# EAGLE board control (EAGLE 6.3)
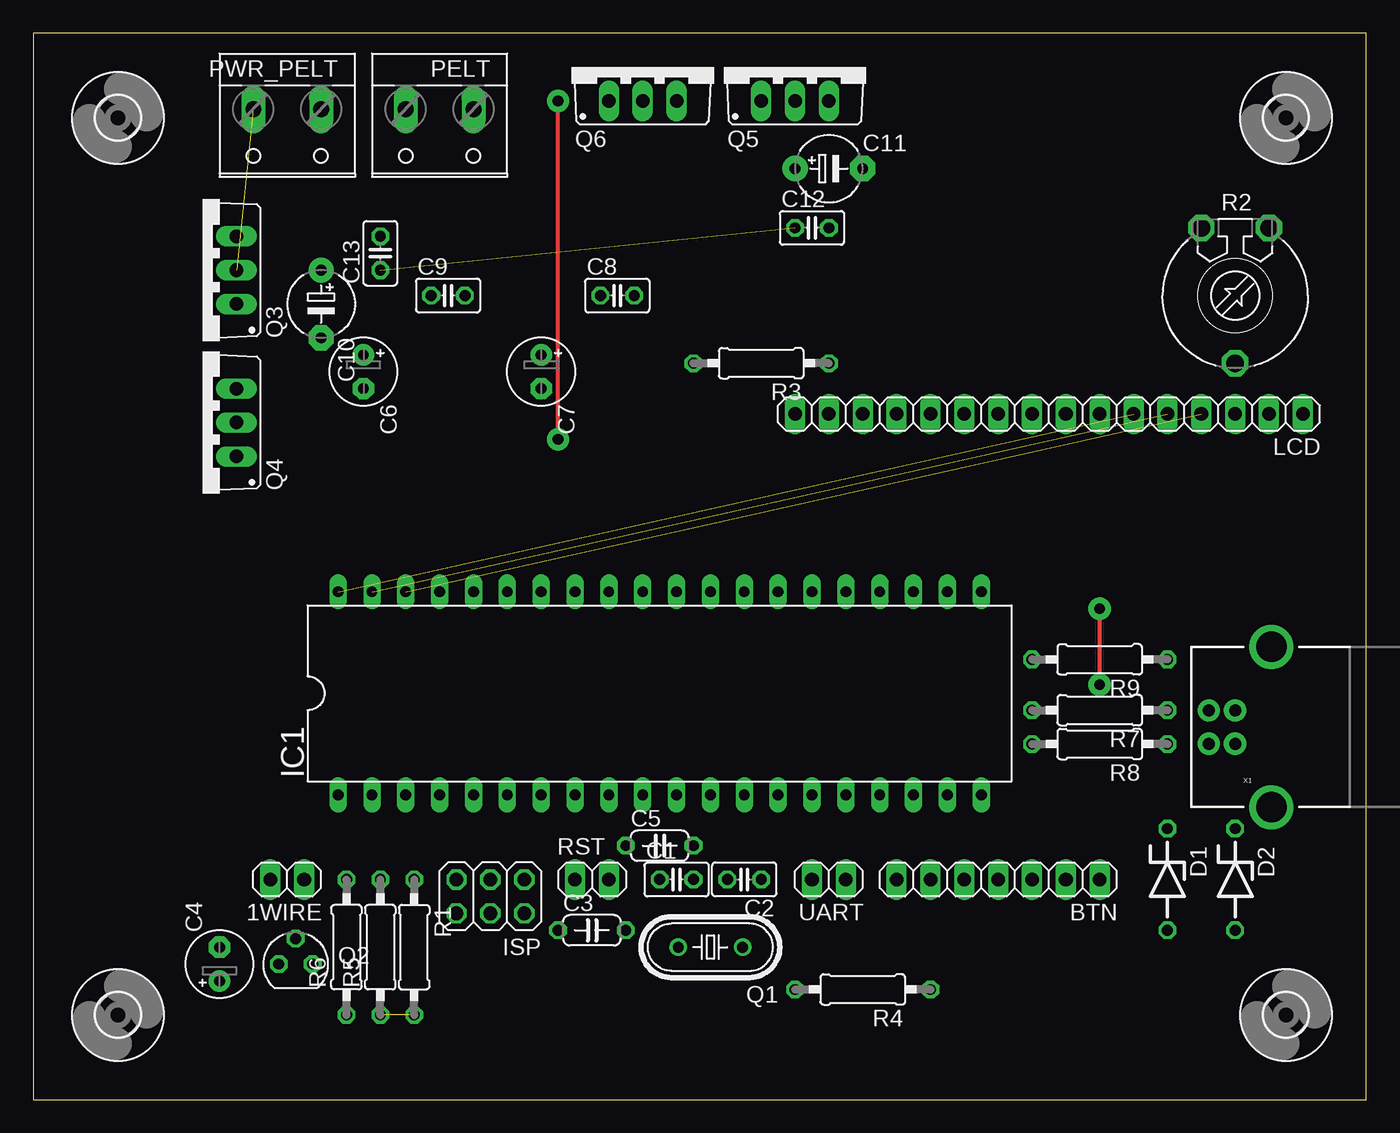
[diagram p0: board, top side]
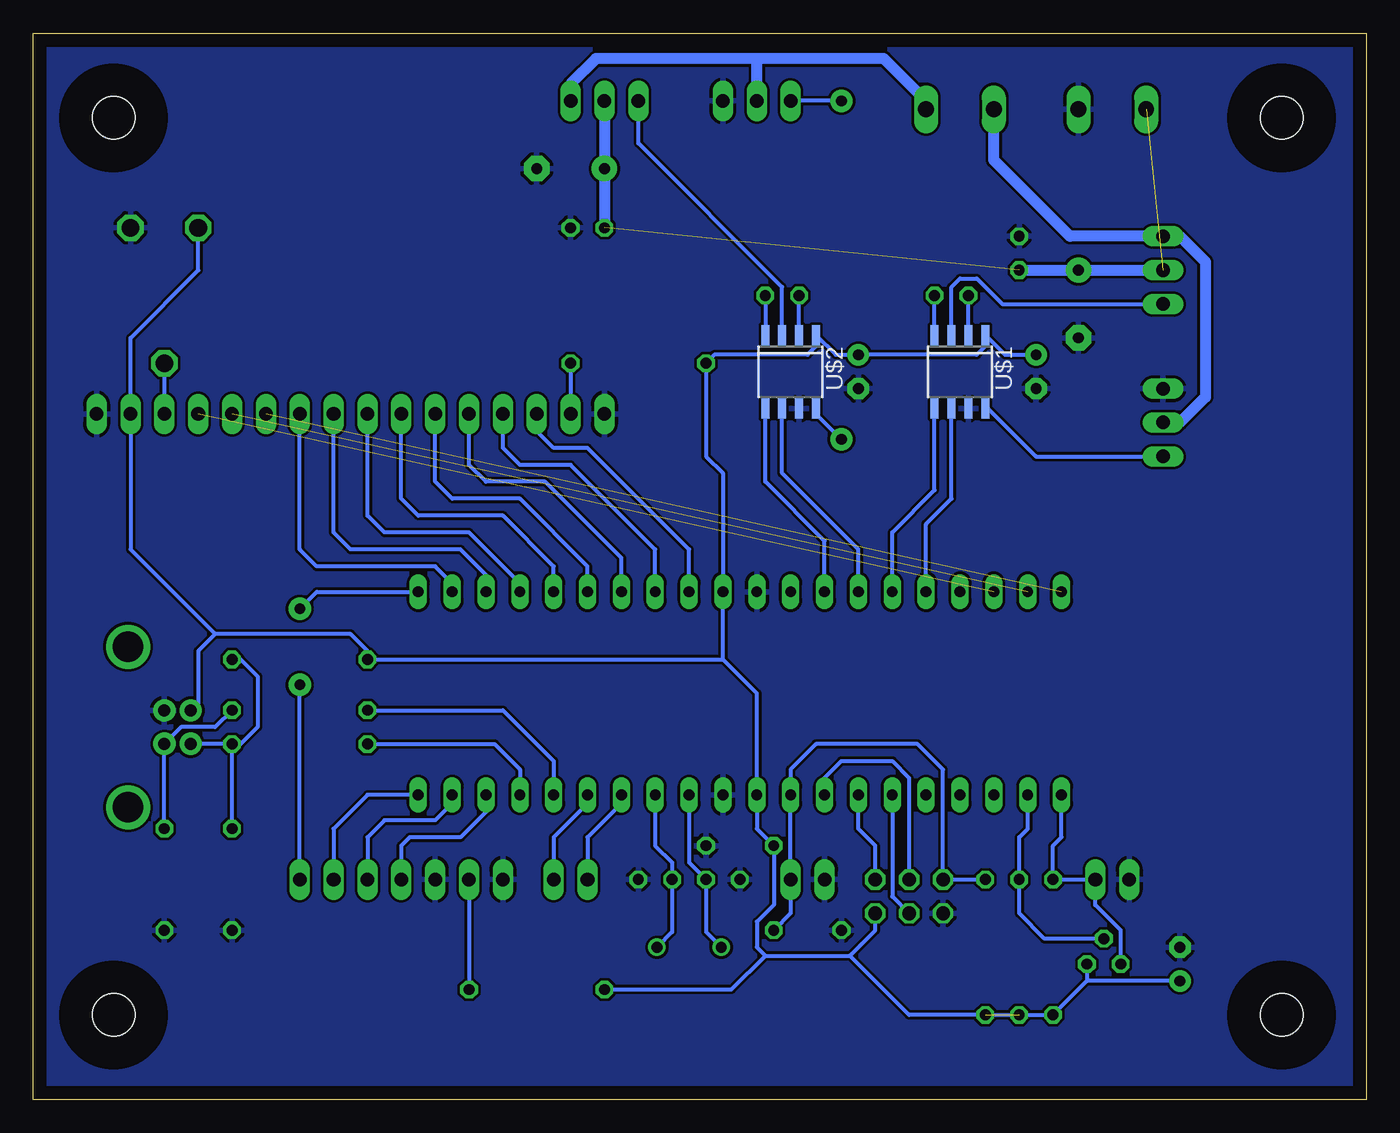
[diagram p1: board, bottom side, seen from below]

Size 100 x 80 mm. Coordinates in mm from the lower left corner, seen from the top.
Outline: 0,0 100,0 100,80 0,80 0,0
Copper layers (1*16): Top 0.035mm / dielectric 1.5mm / Bottom 0.035mm
Design rules "default": minimum track width 10mil, minimum drill 24mil, track to track 8mil, track to pad 8mil, pad to pad 8mil, via to via 8mil, smd to smd 8mil, copper to edge 40mil, drill to drill 8mil, minimum pad ring 10mil, minimum via ring 8mil, stop-mask expansion 4mil, vias tented up to drill 0mil, thermal gap 10mil

## Footprints (pad centres in the part's own frame; a part is rotated, then mirrored left to right if it is on the bottom)
1X02 = drill 1.016 long: 1 -1.27,0; 2 1.27,0
1X07 = drill 1.016 long: 1 -7.62,0; 2 -5.08,0; 3 -2.54,0; 4 0,0; 5 2.54,0; 6 5.08,0; 7 7.62,0
C025-025X050 = drill 0.813 octagon: 1 -1.27,0; 2 1.27,0
C050-024X044 = drill 0.813 octagon: 1 -2.54,0; 2 2.54,0
E2,5-5 = drill 0.813 pad 1.6: + -1.27,0 | drill 0.813 pad 1.6 octagon: - 1.27,0
E5-5 = drill 0.813 pad 1.905: + -2.54,0 | drill 0.813 pad 1.905 octagon: - 2.54,0
ZDIO-7.5 = drill 0.813 octagon: A 3.81,0; C -3.81,0
3,2 = hole 3.2: 0,0
DIL40 = drill 0.813 long: 1 -24.13,-7.62; 2 -21.59,-7.62; 3 -19.05,-7.62; 4 -16.51,-7.62; 5 -13.97,-7.62; 6 -11.43,-7.62; 7 -8.89,-7.62; 8 -6.35,-7.62; 9 -3.81,-7.62; 10 -1.27,-7.62; 11 1.27,-7.62; 12 3.81,-7.62; 13 6.35,-7.62; 14 8.89,-7.62; 15 11.43,-7.62; 16 13.97,-7.62; 17 16.51,-7.62; 18 19.05,-7.62; 19 21.59,-7.62; 20 24.13,-7.62; 21 24.13,7.62; 22 21.59,7.62; 23 19.05,7.62; 24 16.51,7.62; 25 13.97,7.62; 26 11.43,7.62; 27 8.89,7.62; 28 6.35,7.62; 29 3.81,7.62; 30 1.27,7.62; 31 -1.27,7.62; 32 -3.81,7.62; 33 -6.35,7.62; 34 -8.89,7.62; 35 -11.43,7.62; 36 -13.97,7.62; 37 -16.51,7.62; 38 -19.05,7.62; 39 -21.59,7.62; 40 -24.13,7.62
2X03 = drill 1.016 octagon: 1 -2.54,-1.27; 2 -2.54,1.27; 3 0,-1.27; 4 0,1.27; 5 2.54,-1.27; 6 2.54,1.27
1X16 = drill 1.016 long: 1 -19.05,0; 2 -16.51,0; 3 -13.97,0; 4 -11.43,0; 5 -8.89,0; 6 -6.35,0; 7 -3.81,0; 8 -1.27,0; 9 1.27,0; 10 3.81,0; 11 6.35,0; 12 8.89,0; 13 11.43,0; 14 13.97,0; 15 16.51,0; 16 19.05,0
W237-132 = drill 1.194 long: 1 -2.54,-0.635; 2 2.54,-0.635
HC49U-V = drill 0.813: 1 -2.413,0; 2 2.413,0
SOT54E = drill 0.813 octagon: D -1.27,0; G 0,1.905; S 1.27,0
TO220BV = drill 1.016 long: D 0,-2.54; G -2.54,-2.54; S 2.54,-2.54
0207/10 = drill 0.813 octagon: 1 -5.08,0; 2 5.08,0
LI10 = drill 1.321 octagon: A -2.54,-5.08; E 2.54,-5.08; S 0,5.08
SOIC8 = smd 0.6 x 1.5: 1 -1.905,-2.75; 2 -0.635,-2.75; 3 0.635,-2.75; 4 1.905,-2.75; 5 1.905,2.75; 6 0.635,2.75; 7 -0.635,2.75; 8 -1.905,2.75
USB-B-PTH = drill 0.914 pad 1.676: D+ 0,1.25; D- 1.981,1.25; GND 0,-1.25; VBUS 1.981,-1.25 | drill 2.286: S1 -2.718,-6.02; S2 -2.718,6.02

## Placement (x,y rotation side)
1WIRE  [1X02]  19.05,16.51 180 top
BTN  [1X07]  72.39,16.51 180 top
C1  [C025-025X050]  48.26,16.51 0 top
C2  [C025-025X050]  53.34,16.51 180 top
C3  [C050-024X044]  41.91,12.7 0 top
C4  [E2,5-5]  13.97,10.16 90 top
C5  [C050-024X044]  46.99,19.05 0 top
C6  10u  [E2,5-5]  24.77,54.61 270 top
C7  10u  [E2,5-5]  38.1,54.61 270 top
C8  100n  [C025-025X050]  43.81,60.33 0 top
C9  100n  [C025-025X050]  31.11,60.33 0 top
C10  4u7  [E5-5]  21.59,59.69 270 top
C11  4u7  [E5-5]  59.69,69.85 0 top
C12  100n  [C025-025X050]  58.42,65.41 0 top
C13  100n  [C025-025X050]  26.04,63.5 90 top
D1  3V6  [ZDIO-7.5]  85.09,16.51 270 top
D2  3V6  [ZDIO-7.5]  90.17,16.51 270 top
H1  MOUNT-HOLE3.2  [3,2]  6.35,6.35 0 top
H2  MOUNT-HOLE3.2  [3,2]  93.98,6.35 0 top
H3  MOUNT-HOLE3.2  [3,2]  6.35,73.66 0 top
H4  MOUNT-HOLE3.2  [3,2]  93.98,73.66 0 top
IC1  MEGA16-P  [DIL40]  46.99,30.48 0 top
ISP  [2X03]  34.29,15.24 180 top
LCD  [1X16]  76.2,51.44 180 top
PELT  [W237-132]  30.48,73.66 180 top
PWR_PELT  [W237-132]  19.05,73.66 180 top
Q1  [HC49U-V]  50.8,11.43 180 top
Q2  BS250  [SOT54E]  19.68,10.16 0 top
Q3  IRF530  [TO220BV]  12.7,62.23 90 top
Q4  IRF530  [TO220BV]  12.7,50.8 90 top
Q5  IRF530  [TO220BV]  57.15,77.47 0 top
Q6  IRF530  [TO220BV]  45.72,77.47 0 top
R1  4k7  [0207/10]  28.57,11.43 270 top
R2  [LI10]  90.17,60.33 180 top
R3  ??  [0207/10]  54.61,55.24 180 top
R4  ??  [0207/10]  62.23,8.26 180 top
R5  ??  [0207/10]  26.04,11.43 90 top
R6  4k7  [0207/10]  23.5,11.43 90 top
R7  68R  [0207/10]  80.01,29.21 180 top
R8  68R  [0207/10]  80.01,26.67 180 top
R9  1k5  [0207/10]  80.01,33.02 180 top
RST  [1X02]  41.91,16.51 0 top
U$1  LM5101  [SOIC8]  30.48,54.61 180 bottom
U$2  LM5101  [SOIC8]  43.18,54.61 180 bottom
UART  [1X02]  59.69,16.51 180 top
X1  USBPTH  [USB-B-PTH]  90.17,27.94 180 top

## Library data of the parts
1WIRE BTN ISP LCD RST UART = pinhead
C1-C13 R1 R3-R9 = resistor
D1 D2 = diode
H1-H4 = holes
IC1 = atmel; MPN: ATMEGA16-16PU; OC_FARNELL: 9171142; OC_NEWARK: 01M6885
PELT PWR_PELT = con-wago-508; OC_FARNELL: unknown; OC_NEWARK: unknown
Q1 = crystal; OC_FARNELL: 1666969; OC_NEWARK: unknown
Q2 = transistor-small-signal
Q3-Q6 = transistor-power
R2 = pot
U$1 U$2 = lm5101
X1 = SparkFun

## Nets
+5V: C4.+ C5.1 C6.+ C7.+ IC1.10 IC1.30 ISP.2 LCD.2 Q2.S R1.2 R2.E R3.2 R4.2 R5.1 R6.1 R9.2 U$1.1 U$2.1 X1.VBUS
GND: 1WIRE.2 BTN.5 BTN.7 C1.1 C2.1 C3.1 C4.- C5.2 C6.- C7.- C10.- C11.- C12.2 C13.2 D1.A D2.A IC1.11 IC1.31 ISP.6 LCD.1 LCD.16 PWR_PELT.1 Q4.S Q6.S R2.A RST.1 U$1.7 U$2.7 X1.GND
MISO: IC1.7 ISP.1
MOSI: IC1.6 ISP.4
N$1: C1.2 IC1.12 Q1.2
N$2: C2.2 IC1.13 Q1.1
N$3: IC1.33 U$2.5
N$4: IC1.2 Q2.G R5.2
N$5: LCD.3 R2.S
N$6: LCD.15 R3.1
N$7: IC1.22 LCD.7
N$8: IC1.23 LCD.8
N$9: IC1.24 LCD.9
N$10: IC1.25 LCD.10
N$11: IC1.26 LCD.11
N$12: IC1.27 LCD.12
N$13: IC1.28 LCD.13
N$14: IC1.29 LCD.14
N$15: IC1.40 LCD.6
N$16: IC1.39 LCD.5
N$17: IC1.38 LCD.4
N$18: IC1.16 R7.2
N$19: IC1.17 R8.2
N$20: BTN.6 R4.1
N$21: BTN.1 IC1.21
N$22: BTN.2 IC1.20
N$23: BTN.3 IC1.19
N$24: BTN.4 IC1.18
N$25: 1WIRE.1 IC1.1 Q2.D R6.2
N$26: IC1.15 UART.1
N$27: IC1.14 UART.2
N$28: D2.C R7.1 X1.D+
N$29: D1.C R8.1 R9.1 X1.D-
N$30: IC1.34 U$2.6
N$31: IC1.35 U$1.5
N$32: IC1.36 U$1.6
N$33: C9.1 U$1.2
N$34: C8.1 U$2.2
N$35: C8.2 U$2.4
N$36: C9.2 U$1.4
N$37: PELT.2 Q3.S Q4.D
N$38: PELT.1 Q5.S Q6.D
N$39: Q3.G U$1.3
N$40: Q4.G U$1.8
N$41: Q5.G U$2.3
N$42: Q6.G U$2.8
N$46: C10.+ C11.+ C12.1 C13.1 PWR_PELT.2 Q3.D Q5.D
RESET: C3.2 IC1.9 ISP.5 R1.1 RST.2
SCK: IC1.8 ISP.3

## Tracks (layer width: path | path; a pad name or v marks a point on that pad's centre or on a via)
+5V  (1 unrouted)
  Bottom 0.305: 48.26,33.02 45.72,30.48 IC1.10 45.72,20.32 C5.1 44.45,14.61 45.72,13.34 45.72,11.43 45.09,10.79 | 48.26,33.02 IC1.30 48.26,46.99 49.53,48.26 R3.2 48.9,55.88 41.91,55.88 41.27,56.52 U$2.1 39.8,55.88 C7.+ 29.21,55.88 28.57,56.52 U$1.1 27.09,55.88 C6.+ | 48.26,33.02 R9.2 74.93,33.66 76.2,34.92 86.36,34.92 | 45.09,10.79 38.73,10.79 | 38.73,10.79 36.83,12.7 ISP.2 | 86.36,34.92 87.63,33.66 87.63,29.75 X1.VBUS | 38.73,10.79 34.29,6.35 R1.2 R6.1 20.95,8.89 | Q2.S 20.95,8.89 | C4.+ 20.95,8.89 | R4.2 47.62,8.26 45.09,10.79 | 86.36,34.92 92.71,41.27 LCD.2 92.71,57.15 87.63,62.23 R2.E
GND
  pour Bottom: 0,81.28 101.6,81.28 101.6,-1.27 -2.54,-1.27 -2.54,81.28
MISO
  Bottom 0.305: ISP.1 36.83,19.05 38.1,20.32 IC1.7
MOSI
  Bottom 0.305: IC1.6 35.56,15.24 ISP.4
N$1
  Bottom 0.305: Q1.2 49.53,12.57 C1.2 50.8,17.78 IC1.12
N$2
  Bottom 0.305: IC1.13 53.34,19.05 52.07,17.78 C2.2 52.07,12.57 Q1.1
N$3
  Bottom 0.305: IC1.33 40.64,41.91 45.09,46.35 U$2.5
N$4
  Bottom 0.305: IC1.2 25.4,20.32 26.04,19.68 R5.2 26.04,13.97 24.13,12.06 Q2.G
N$5
  Bottom 0.305: R2.S LCD.3
N$6
  Bottom 0.305: R3.1 LCD.15
N$7
  Bottom 0.305: IC1.22 68.58,38.73 69.85,40.01 78.74,40.01 80.01,41.27 LCD.7
N$8
  Bottom 0.305: IC1.23 66.04,39.37 67.94,41.27 76.2,41.27 77.47,42.55 LCD.8
N$9
  Bottom 0.305: IC1.24 63.5,38.73 67.31,42.55 73.66,42.55 74.93,43.81 LCD.9
N$10
  Bottom 0.305: IC1.25 60.96,40.01 64.77,43.81 71.12,43.81 72.39,45.09 LCD.10
N$11
  Bottom 0.305: IC1.26 58.42,40.01 63.5,45.09 68.58,45.09 69.85,46.35 LCD.11
N$12
  Bottom 0.305: IC1.27 55.88,40.64 61.59,46.35 66.04,46.35 67.31,47.62 LCD.12
N$13
  Bottom 0.305: IC1.28 53.34,41.27 59.69,47.62 63.5,47.62 64.77,48.9 LCD.13
N$14
  Bottom 0.305: IC1.29 50.8,41.27 58.42,48.9 60.96,48.9 62.23,50.16 LCD.14
N$15  (1 unrouted)
N$16  (1 unrouted)
N$17  (1 unrouted)
N$18
  Bottom 0.305: R7.2 64.77,29.21 60.96,25.4 IC1.16
N$19
  Bottom 0.305: R8.2 65.41,26.67 63.5,24.77 IC1.17
N$20
  Bottom 0.305: BTN.6 R4.1
N$21  (via drill 0.8 pad 1.68)
  Top 0.305: v80.01,31.11 v80.01,36.83
  Bottom 0.305: BTN.1 v80.01,31.11 | v80.01,36.83 78.74,38.1 IC1.21
N$22
  Bottom 0.305: IC1.20 74.93,22.86 77.47,20.32 BTN.2
N$23
  Bottom 0.305: IC1.19 68.58,22.23 69.85,20.95 73.66,20.95 74.93,19.68 BTN.3
N$24
  Bottom 0.305: IC1.18 66.04,21.59 67.94,19.68 71.75,19.68 72.39,19.05 BTN.4
N$25
  Bottom 0.305: IC1.1 22.86,19.68 23.5,19.05 R6.2 1WIRE.1 20.32,14.61 18.41,12.7 Q2.D
N$26
  Bottom 0.305: IC1.15 58.42,22.23 60.96,19.68 UART.1
N$27
  Bottom 0.305: IC1.14 55.88,22.23 58.42,19.68 UART.2
N$28
  Bottom 0.305: R7.1 86.36,27.94 88.92,27.94 X1.D+ D2.C
N$29
  Bottom 0.305: R8.1 88.17,26.67 | R9.1 84.45,33.02 83.19,31.75 83.19,27.94 84.45,26.67 R8.1 | D1.C R8.1
  Bottom 0.406: 88.17,26.67 X1.D-
N$30
  Bottom 0.305: IC1.34 38.1,41.27 43.81,46.99 U$2.6
N$31
  Bottom 0.305: IC1.35 35.56,42.55 32.38,45.72 U$1.5
N$32
  Bottom 0.305: IC1.36 33.02,43.18 31.11,45.09 U$1.6
N$33
  Bottom 0.305: U$1.2 C9.1
N$34
  Bottom 0.305: U$2.2 C8.1
N$35
  Bottom 0.305: C8.2 U$2.4
N$36
  Bottom 0.305: U$1.4 C9.2
N$37
  Bottom 0.813: PELT.2 27.94,70.48 22.23,64.77 Q3.S 13.97,64.77 12.06,62.87 12.06,52.7 13.97,50.8 Q4.D
N$38
  Bottom 0.813: PELT.1 33.02,74.93 36.2,78.11 45.72,78.11 | 45.72,78.11 57.78,78.11 59.69,76.2 Q5.S | Q6.D 45.72,78.11
N$39
  Bottom 0.305: U$1.3 31.11,60.96 30.48,61.59 29.21,61.59 27.3,59.69 Q3.G
N$40
  Bottom 0.305: U$1.8 28.36,51.86 24.77,48.26 Q4.G
N$41
  Bottom 0.305: U$2.3 43.81,60.96 54.61,71.75 Q5.G
N$42  (via drill 0.8 pad 1.68)
  Top 0.305: v39.37,49.53 v39.37,74.93
  Bottom 0.305: U$2.8 41.27,51.44 v39.37,49.53 | v39.37,74.93 Q6.G
N$46  (2 unrouted)
  Bottom 0.813: Q3.D C10.+ C13.1 | Q5.D C11.+ C12.1
RESET
  Bottom 0.305: C3.2 43.18,13.97 RST.2 IC1.9 43.18,24.77 41.27,26.67 33.66,26.67 31.75,24.77 ISP.5 R1.1
SCK
  Bottom 0.305: IC1.8 40.64,24.13 39.37,25.4 35.56,25.4 34.29,24.13 ISP.3